# Altium PCB LED_Base_V3.PcbDoc
Units mil, origin at the board's own origin, x right, y up, seen from the top; angles counter-clockwise.
Board outline 1181.1 x 1181.1 mil, 2 copper layers (Top Layer, Bottom Layer); 16 components, 21 nets, 56 pads, 17 vias.
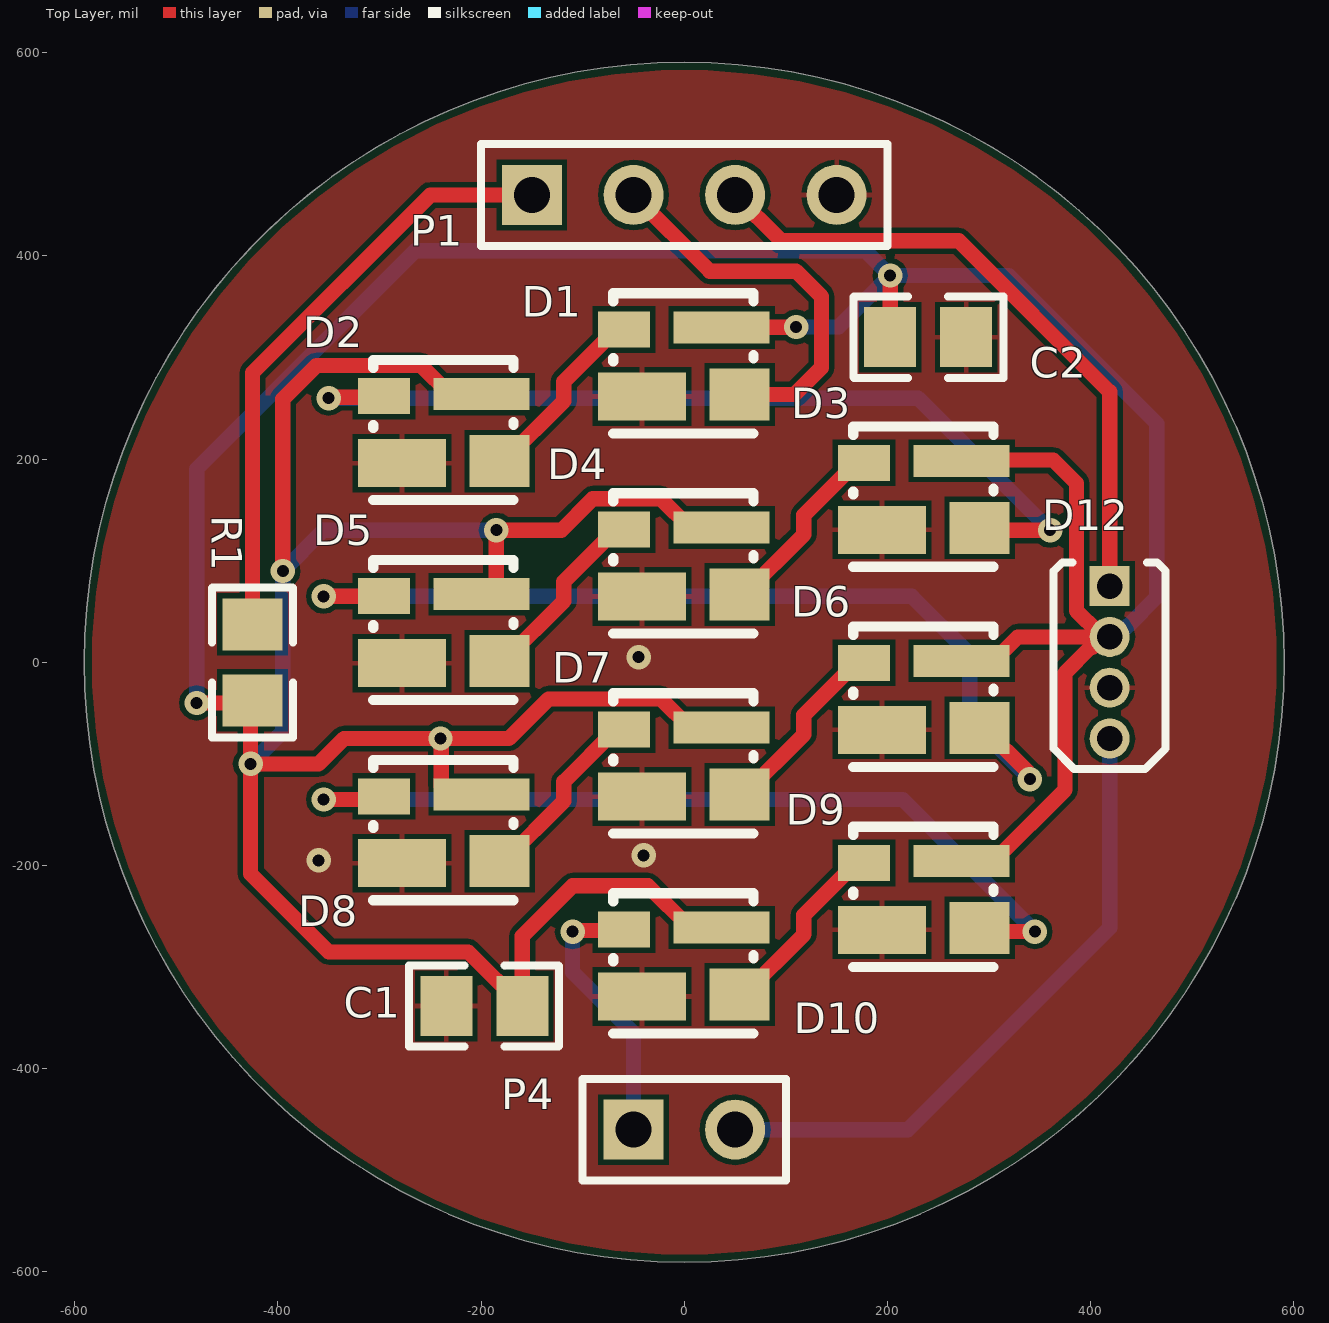
[diagram p0: Top Layer view]
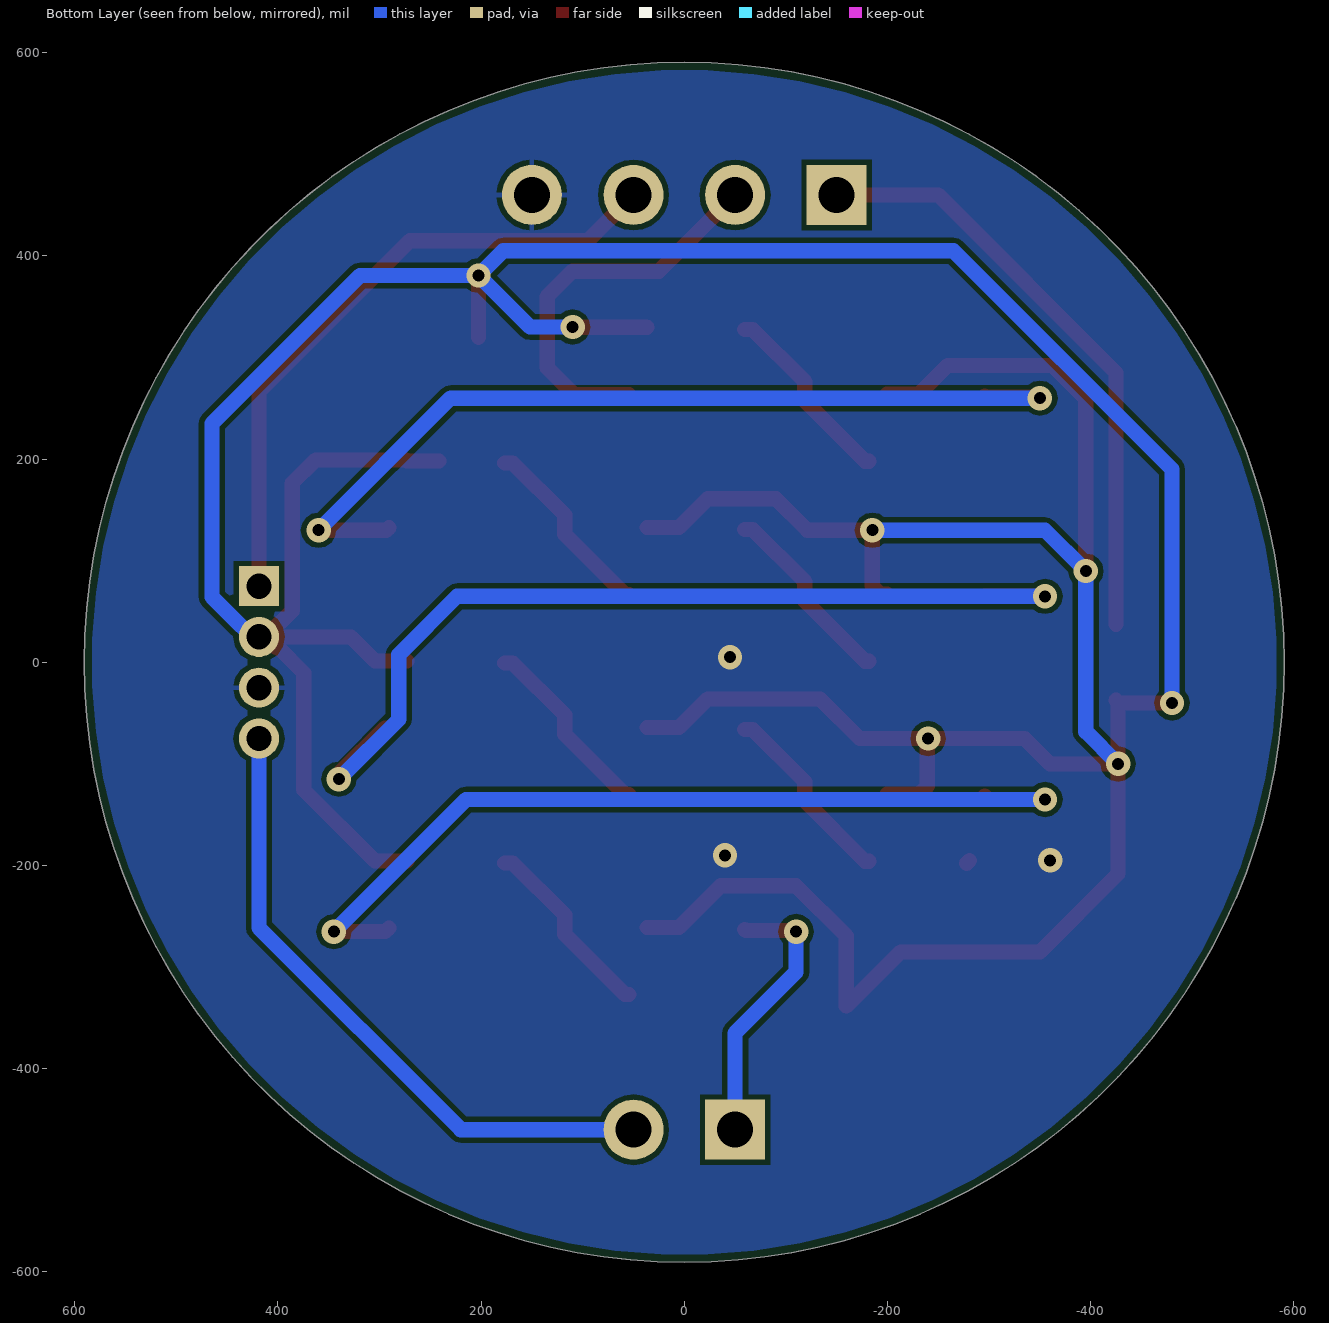
[diagram p1: Bottom Layer view, seen from below]
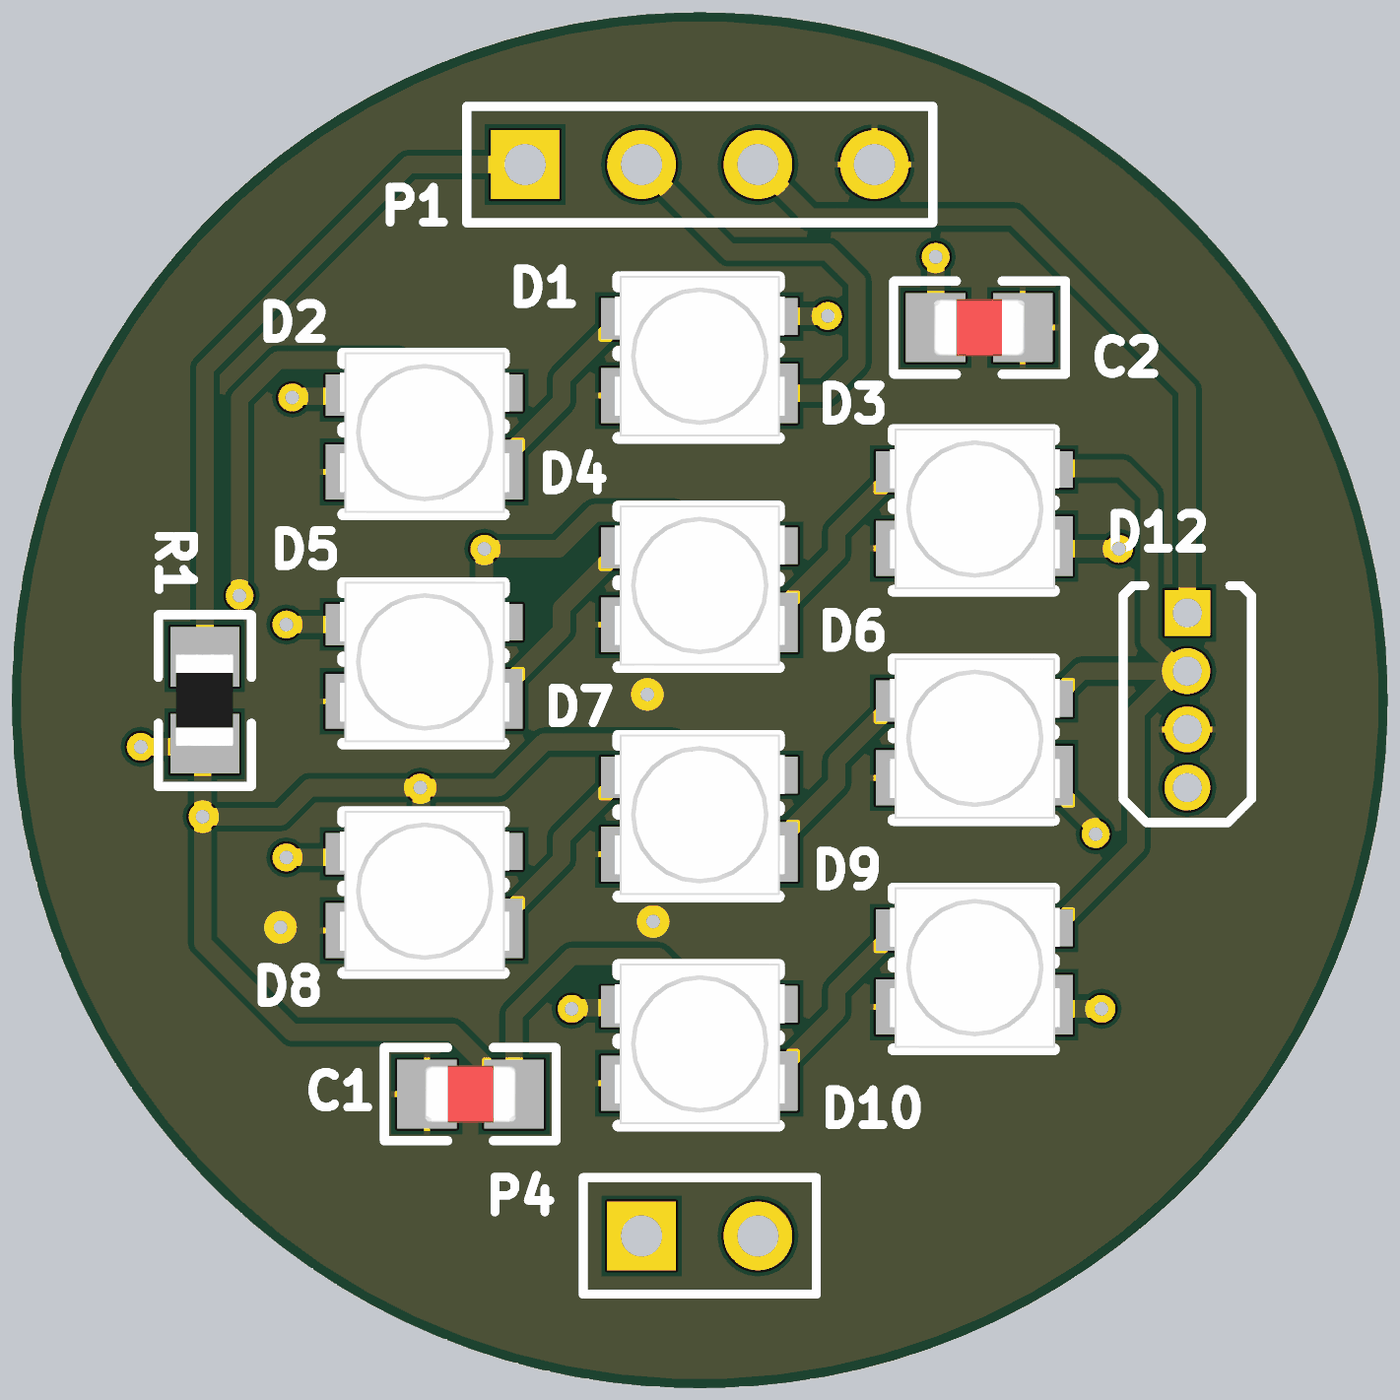
[diagram p2: 3D render of the assembled board from above, using the file's embedded part models]

## Layer stack, top to bottom
Top Solder: solder mask 0.4, Solder Resist, Dk 3.5
Top Layer: signal copper 1.4
Dielectric 1: dielectric 12.6, FR-4, Dk 4.8
Bottom Layer: signal copper 1.4
Bottom Solder: solder mask 0.4, Solder Resist, Dk 3.5

## Board outline
-590.55,0 ccw(c0,0) 0,-590.55 ccw(c0,0) 590.55,0 ccw(c0,0) 0,590.55 ccw(c0,0)

## Design rules (kind name [scope] priority, off if disabled: settings)
BoardOutlineClearance [All] p1: gap=7.87 ignorepadtopadclearanceinfootprint=FALSE
Clearance [All] p1: gap=5 ignorepadtopadclearanceinfootprint=TRUE except(10: Arc-Hole Track-Hole SMDPad-Hole THPad-Hole Via-Hole Fill-Hole Poly-Hole Region-Hole Text-Hole)
ComponentClearance [All] p1: gap=5 collisioncheckmode=3 verticalgap=5 showdistances=TRUE
DiffPairsRouting [All] p1: maxlimit=10 minlimit=5 mostfreqgap=5 toplayer_minwidth=5 toplayer_maxwidth=1000 toplayer_prefwidth=5 bottomlayer_minwidth=5 bottomlayer_maxwidth=1000 bottomlayer_prefwidth=5 maxuncoupledlength=500
Height [All] p1: minheight=0 maxheight=71497.94 prefheight=500
HoleSize [All] p1: absolutevalues=TRUE maxlimit=248.03 minlimit=11.81 maxpercent=80.000 minpercent=20.000
HoleToHoleClearance [All] p1: gap=10 allowstackedmicrovias=FALSE
MinimumAnnularRing [All] p1: minimumring=6
MinimumSolderMaskSliver [All] p1: minsoldermaskwidth=6
PlaneClearance [All] p1: clearance=5
PlaneConnect PlaneConnectPowerPads [InPadClass('PowerPads')] p1: planeconnectstyle=Direct reliefexpansion=20 reliefentries=4 reliefconductorwidth=10 reliefairgap=10
PlaneConnect [All] p2: pad.planeconnectstyle=Relief pad.reliefexpansion=11.81 pad.reliefentries=4 pad.reliefconductorwidth=5 pad.reliefairgap=5 via.planeconnectstyle=Direct via.reliefexpansion=11.81 via.reliefentries=4 via.reliefconductorwidth=5 via.reliefairgap=5
PolygonConnect PolygonConnectPowerPads [All vs (InPadClass('PowerPads'))] p1: connectstyle=Direct reliefconductorwidth=10 reliefentries=4 polygonreliefangle="90 Angle" airgapwidth=10
PolygonConnect [All] p2: thpad.connectstyle=Relief thpad.reliefconductorwidth=5 thpad.reliefentries=4 thpad.polygonreliefangle="90 Angle" thpad.airgapwidth=5 smdpad.connectstyle=Relief smdpad.reliefconductorwidth=5 smdpad.reliefentries=4 smdpad.polygonreliefangle="90 Angle" smdpad.airgapwidth=5 via.connectstyle=Direct via.reliefconductorwidth=5 via.reliefentries=4 via.polygonreliefangle="90 Angle" via.airgapwidth=5
RoutingVias [All] p1: holewidth=11.81 width=23.62 viastyle="Through Hole" minholewidth=11.81 minwidth=23.62 maxholewidth=23.62 maxwidth=259.84
SilkToSilkClearance [All] p1: silktosilkclearance=5
SilkToSolderMaskClearance [IsPad] p1: minsilkscreentomaskgap=5 clearancetoexposedcopper=TRUE
SolderMaskExpansion [All] p1: expansion=2 istentingtop=FALSE
UnRoutedNet [All] p1: checkbadconnections=TRUE
Width Width_10mil [All] p1: maxlimit=1000 minlimit=10 preferedwidth=10 minimp=50.000000 maximp=50.000000 favimp=50.000000
Width Width_6mil [All] p2: maxlimit=1000 minlimit=6 preferedwidth=6 minimp=50.000000 maximp=50.000000 favimp=50.000000
Width Power_20mil [All] p3: maxlimit=1000 minlimit=20 preferedwidth=20 minimp=50.000000 maximp=50.000000 favimp=50.000000
Width Power_12mil [All] p4: maxlimit=1000 minlimit=12 preferedwidth=12 minimp=50.000000 maximp=50.000000 favimp=50.000000
Width Width_5mil [All] p5: maxlimit=1000 minlimit=5 preferedwidth=5 minimp=50.000000 maximp=50.000000 favimp=50.000000
19 further rules are at their usual default settings.

## Components (designator, comment, footprint, x,y, rotation, side; value= is the part's Value field where it differs from the comment)
C1 "47uF" 0805C -196.85,-338.23 r180 top
C2 "47uF" 0805C 240,320 r0 top
D1 "Diode_SK6812MINI" SK6812MINI 0,295.28 r0 top
D2 "Diode_SK6812MINI" SK6812MINI -236.22,229.65 r0 top
D3 "Diode_SK6812MINI" SK6812MINI 236.22,164.02 r0 top
D4 "Diode_SK6812MINI" SK6812MINI 0,98.39 r0 top
D5 "Diode_SK6812MINI" SK6812MINI -236.22,32.76 r0 top
D6 "Diode_SK6812MINI" SK6812MINI 236.22,-32.87 r0 top
D7 "Diode_SK6812MINI" SK6812MINI 0,-98.5 r0 top
D8 "Diode_SK6812MINI" SK6812MINI -236.22,-164.13 r0 top
D9 "Diode_SK6812MINI" SK6812MINI 236.22,-229.76 r0 top
D10 "Diode_SK6812MINI" SK6812MINI 0,-295.28 r0 top
D12 "WS2812_Through_Hole_Thin" WS2812_THROUGH_HOLE_SMALLER 418.66,0 r0 top
P1 "Header 4" HDR1X4 -150,460 r0 top
P4 "Header 2" HDR1X2 -50,-460 r0 top
R1 "470" 0805 -425,0 r270 top

## Footprints (in the part's own frame and the unit in brackets; to place one, negate y for a bottom-side part, rotate by r counter-clockwise, add the part's x,y. Pads: shape width x height; smd on the part's side, far side on the other; paste and mask are expansions set on the pad)
0805 [mm] "0805 Footprint"
  rect 1.3x1.5 smd: 1(-0.95,0) 2(0.95,0)
  silkscreen extent -1.87,-1.02 1.88,1.02, body extent -1,-0.63 1,0.62, height 0.5
0805C [mm] "0805 Footprint"
  rect 1.3x1.5 smd: 1(-0.95,0) 2(0.95,0)
  silkscreen extent -1.87,-1.02 1.88,1.02, body extent -1,-0.62 1,0.63, height 0.78
HDR1X2 [mm] "Connector; Header; 2 Position"
  rect 1.5x1.5 hole 0.9: 1(0,0)
  round 1.5 hole 0.9: 2(2.54,0)
  silkscreen extent -1.27,-1.27 3.81,1.27
HDR1X4 [mm] "Connector; Header; 4 Position"
  rect 1.5x1.5 hole 0.9: 1(0,0)
  round 1.5 hole 0.9: 2(2.54,0) 3(5.08,0) 4(7.62,0)
  silkscreen extent -1.27,-1.27 8.89,1.27
SK6812MINI [mm] "SMD LED 3535"
  rect 1.3x0.9 smd: 1(-1.509,0.82)
  rect 2.2x1.2 smd: 2(-1.059,-0.854)
  rect 1.5x1.3 smd: 3(1.385,-0.804)
  rect 2.4x0.8 smd: 4(0.935,0.87)
  silkscreen extent -1.78,-1.78 1.73,1.73, body extent -1.85,-1.75 1.85,1.75, height 1.1
WS2812_THROUGH_HOLE_SMALLER [mm] "THD, 4-Leads, Dia 5.9mm, Pitch 1.27mm"
  rect 1x1 hole 0.635 paste+0: 1(0,1.905)
  round 1 hole 0.635 paste+0: 2(0,0.635) 3(0,-0.635) 4(0,-1.905)
  silkscreen extent -1.4,-2.67 1.4,2.5

## Part data
C1 C2: library part C, "Capacitor", Reviewed by="RM - 2018/08/05", Revision="July-2002: Re-released for DXP Platform."
D1 D2 D3 D4 D5 D6 D7 D8 D9 D10: "SMD LED 3535", Manufacturer=Adafruit, Package=SMT_LED_5MM0, Part Number=SK6812MINI, Temperature="-40°C to +85°C", Temperature Range High=+85°C, Temperature Range Low=-40°C, ComponentLink1Description=Upverter, ComponentLink1URL=https://upverter.com/upn/revision/c89e73b2d25df682/, ComponentLink2Description=Datasheet, ComponentLink2URL=https://cdn-shop.adafruit.com/product-files/1138/SK6812+LED+datasheet+.pdf, helpURL=https://upverter.com/upn/revision/c89e73b2d25df682/, Ipc Land Pattern Name=SOIC320P540X160-4, Lead Free=yes, RoHS=TRUE, Supplier 1=Digi-Key, Supplier 2=Mouser
D12: "WS2812 Through Hole LED"
P1: "Header, 4-Pin", LatestRevisionDate=17-Jul-2002, LatestRevisionNote="Re-released for DXP Platform.", Publisher="Altium Limited"
P4: "Header, 2-Pin", LatestRevisionDate=17-Jul-2002, LatestRevisionNote="Re-released for DXP Platform.", Publisher="Altium Limited"
R1: library part R, "Resistor", Reviewed by="RM - 2018/08/05"

## Via types
v1: diameter 24, hole 11.81, Top Layer to Bottom Layer, 17 vias

## Nets (pads, with @x,y where several pads share a name; then routed paths per layer and width w, separated by ;. In a path a pad name is that pad's centre, name@x,y a point inside that pad or via, vN(x,y) a via of type N, cw(c..) or ccw(c..) an arc to the next point about the centre after c; other vN are vias at no path point)
DIN_SK6812: D1.3 P1.2 | length 387.8
  Top Layer w15: P1.2 25,385 110,385 135,360 135,290 108.62,263.62 D1.3
DIN_SK6812_1: 
DIN_SK6812_2: 
DIN_WS2812: D12.1 P1.3 | length 640.2
  Top Layer w15: P1.3 95,415 270,415 418.66,266.34 D12.1
DIN_WS2812_1: 
DIN_WS2812_2: 
DOUT1: D1.1 D2.3 | length 187.1
  Top Layer w15: D2.3 -177.76,197.99 -118.58,257.17 -118.58,276.26 -67.28,327.56 D1.1
DOUT2: D2.1 D3.3 | length 889.2
  Top Layer w15: v1(-350,260) -349.04,260.96 -296.59,260.96 D2.1 ; D3.3 293.11,130 v1(360,130)
  Bottom Layer w15: v1(-350,260) 230,260 v1(360,130)
DOUT3: D3.1 D4.3 | length 187.1
  Top Layer w15: D4.3 58.46,66.73 117.64,125.91 117.64,145 168.94,196.3 D3.1
DOUT4: D4.1 D5.3 | length 187.1
  Top Layer w15: D5.3 -177.76,1.1 -118.58,60.28 -118.58,79.37 -67.28,130.67 D4.1
DOUT5: D5.1 D6.3 | length 939.5
  Top Layer w15: v1(-355,65) v1(-355,65) D5.1 ; D6.3 294.69,-64.53 338.28,-108.12 338.28,-113.28 v1(340,-115)
  Bottom Layer w15: v1(-355,65) 223.73,65 281.01,7.73 281.01,-56.01 v1(340,-115)
DOUT6: D6.1 D7.3 | length 187.1
  Top Layer w15: D7.3 58.46,-130.16 117.64,-70.98 117.64,-51.89 168.94,-0.59 D6.1
DOUT7: D7.1 D8.3 | length 187.1
  Top Layer w15: D8.3 -177.76,-195.79 -118.58,-136.61 -118.58,-117.52 -67.28,-66.22 D7.1
DOUT8: D8.1 D9.3 | length 870.3
  Top Layer w15: v1(-355,-135) -298.78,-135 D8.1 ; D9.3 294.33,-265 v1(345,-265)
  Bottom Layer w15: v1(-355,-135) 215,-135 v1(345,-265)
DOUT9: D9.1 D10.3 | length 187
  Top Layer w15: D10.3 58.46,-326.93 117.64,-267.76 117.64,-248.78 168.94,-197.48 D9.1
DOUT_SK6812: D10.1 P4.1 | length 271.3
  Top Layer w15: v1(-110,-265) -109,-264 -60.41,-264 D10.1
  Bottom Layer w15: v1(-110,-265) -110,-305 -50,-365 P4.1
DOUT_WS2812: D12.4 P4.2 | length 637.3
  Bottom Layer w15: P4.2 220,-460 418.66,-261.34 D12.4
GND: C1.2 C2.2 D1.2 D2.2 D3.2 D4.2 D5.2 D6.2 D7.2 D8.2 D9.2 D10.2 D12.3 P1.4 | length 3.9
  Top Layer w15: D8.2@-280.67,-195 D8.2
  other v1: -360,-195 -40,-190 -45,5
NetP1_1: P1.1 R1.1 | length 595.1
  Top Layer w15: R1.1 -425,285 -250,460 P1.1
VCC: 
VDD: C1.1 C2.1 D1.4 D2.4 D3.4 D4.4 D5.4 D6.4 D7.4 D8.4 D9.4 D10.4 D12.2 R1.2 | length 5163
  Top Layer w15: v1(-480,-40) -427.6,-40 R1.2@-426.91,-39.31 ; R1.2 R1.2@-426.91,-39.31 ; v1(-395.16,89.84) -395.16,259.22 -362.24,292.15 -259.15,292.15 -230.91,263.9 D2.4 ; D8.4 -230.91,-129.88 -239.15,-121.63 -239.15,-75.85 v1(-240,-75) ; D5.4 -193.25,67.01 -185,75.26 v1(-185,130) -121.06,130 -90.18,160.89 -22.93,160.89 5.31,132.64 D4.4 ; D10.4 5.31,-261.02 -35.71,-220 -110,-220 -159.45,-269.45 C1.1 -212.68,-285 -350,-285 -426.91,-208.09 v1(-426.91,-100) ; D7.4 5.31,-64.25 -22.93,-36 -133.7,-36 -172.69,-75 v1(-240,-75) ; D1.4 37.05,329.76 109.76,329.76 v1(110,330) ; C2.1 v1(202.6,380.69) ; D3.4@241.54,198.27 D3.4 273.81,199.04 363.13,199.04 385.96,176.21 385.96,50.65 396.34,40.27 396.8,40.27 D12.2@412.07,25 ; D9.4 304.53,-195.51 374.56,-125.48 374.56,-10.44 399.5,14.5 401.57,14.5 D12.2@412.07,25 ; D6.4 304.53,1.38 328.15,25 D12.2@410,25 ; D12.2 D12.2@412.07,25 ; v1(-426.91,-100) -360,-100 -335,-75 v1(-240,-75) ; v1(-426.91,-100) R1.2@-426.91,-39.31
  Bottom Layer w15: v1(-480,-40) -480,190 -265,405 178.29,405 v1(202.6,380.69) ; v1(-426.91,-100) -395.16,-68.26 v1(-395.16,89.84) -355,130 v1(-185,130) ; v1(110,330) 151.91,330 v1(202.6,380.69) ; D12.2 425.26,25 436.56,36.31 437.01,36.31 465,64.29 465,235 319.31,380.69 v1(202.6,380.69)

## Polygon pours and split planes (outlines as drawn)
GND on Top Layer "GND_L01_P000" (solid, pour order 0): -590.55,0 ccw(c0,0) 0,-590.55 ccw(c0,0) 590.55,0 ccw(c0,0) 0,590.55 ccw(c0,0)
GND on Bottom Layer "GND_L02_P001" (solid, pour order 1): -590.55,0 ccw(c0,0) 0,-590.55 ccw(c0,0) 590.55,0 ccw(c0,0) 0,590.55 ccw(c0,0)

## Silkscreen, mask and mechanical layers (free items; w line width, h text height)
Mechanical 1:
  circle w10: c0,0 r590.55
Mechanical 13:
  circle w10: c0,0 r492.13